# EAGLE board GPS_radiologger_v11 (EAGLE 9.5.1)
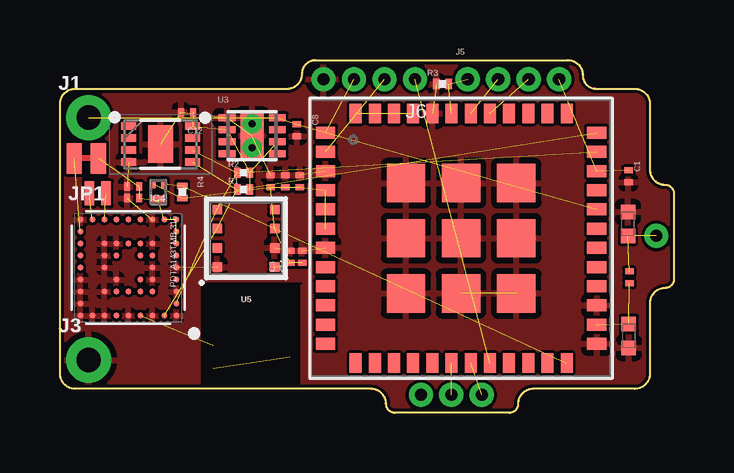
[diagram p0: board, top side]
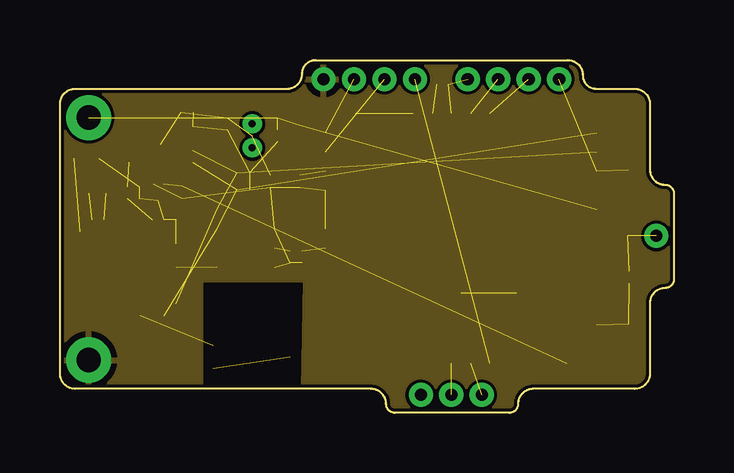
[diagram p1: board, inner layer Route2]
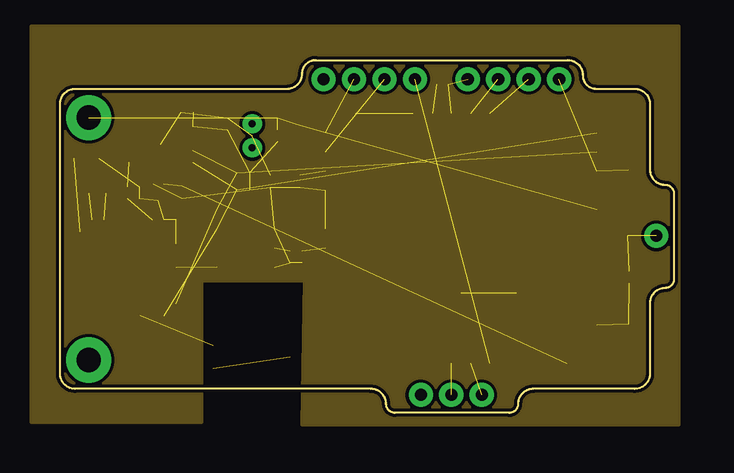
[diagram p2: board, inner layer Route15]
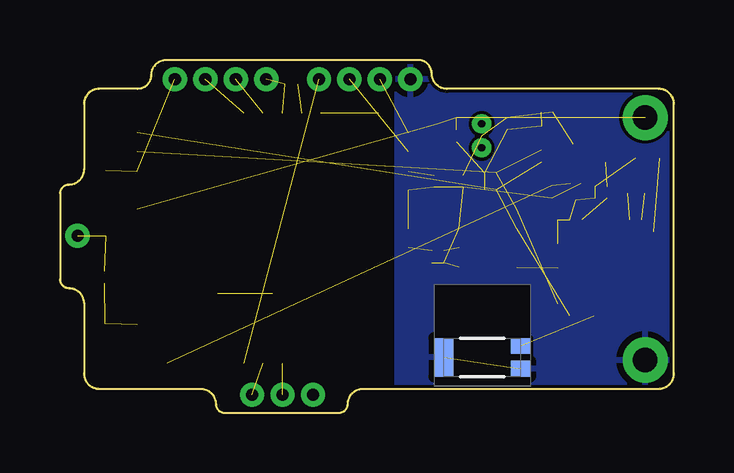
[diagram p3: board, bottom side, seen from below]

Size 25.6 x 14.7 mm. Coordinates in mm from the lower left corner, seen from the top.
Outline: 22.36,13.5 23.96,13.5 arc-90 24.6,12.87 24.6,10.13 arc90 25.23,9.5 arc-90 25.6,9.13 25.6,5.57 arc-90 25.23,5.2 arc90 24.6,4.56 24.6,1.64 arc-90 23.96,1 19.73,1 arc90 19.1,0.36 arc-90 18.73,0 13.96,0 arc-90 13.6,0.36 arc90 12.96,1 0.64,1 arc-90 0,1.64 0,12.87 arc-90 0.64,13.5 9.46,13.5 arc90 10.1,14.13 arc-90 10.66,14.7 21.16,14.7 arc-90 21.8,14.06 arc90 22.36,13.5
Copper layers (1+2*15+16): Top 0.035mm / dielectric 0.2mm / Route2 0.035mm / dielectric 0.23mm / Route15 0.035mm / dielectric 0.2mm / Bottom 0.035mm
Design rules "default *": minimum track width 5mil, minimum drill 0.25mm, track to track 5mil, track to pad 5mil, pad to pad 5mil, via to via 5mil, smd to smd 5mil, copper to edge 5mil, drill to drill 3mil, minimum pad ring 10mil, minimum via ring 5mil, stop-mask expansion 4mil, vias tented up to drill 0mil, thermal gap 10mil
Net classes: 1 vcc: width 0 mm

## Footprints (pad centres in the part's own frame; a part is rotated, then mirrored left to right if it is on the bottom)
C0201 = smd 0.25 x 0.35: 1 -0.25,0; 2 0.25,0
SON50P300X200X55-9N = smd 0.63 x 0.32: 1 -1.33,0.75; 2 -1.33,0.25; 3 -1.33,-0.25; 4 -1.33,-0.75; 5 1.33,-0.75; 6 1.33,-0.25; 7 1.33,0.25; 8 1.33,0.75 | smd 1.06 x 1.56: 9 0,0
1X01_NO_SILK = drill 1.016 pad 1.88: 1 0,0
1X01_SMALL = drill 0.508: P$1 0,0
1X03_1.27MM_NO_SILK = drill 0.508 pad 1: 1 0,0; 2 1.27,0; 3 2.54,0
1X04_1.27MM_NO_SILK = drill 0.508 pad 1: 1 0,0; 2 1.27,0; 3 2.54,0; 4 3.81,0
SMT-JUMPER_2_NC_TRACE_NO-SILK = smd 0.635 x 1.27: 1 -0.508,0; 2 0.508,0
0402-TIGHT = smd 0.6 x 0.6: 1 -0.5,0; 2 0.5,0
SOT883(B) = smd 0.4 x 0.25: 1 -0.35,0.225; 2 -0.35,-0.225 | smd 0.4 x 0.7: 3 0.35,0
R0201 = smd 0.28 x 0.43: 1 -0.255,0; 2 0.255,0
TYPEABZ = smd 0.8 x 0.5: P$1 -5.65,4.4; P$2 -5.65,3.6; P$3 -5.65,2.8; P$4 -5.65,2; P$5 -5.65,1.2; P$6 -5.65,0.4; P$7 -5.65,-0.4; P$8 -5.65,-1.2; P$9 -5.65,-2; P$10 -5.65,-2.8; P$11 -5.65,-3.6; P$12 -5.65,-4.4; P$25 5.65,-4.4; P$26 5.65,-3.6; P$27 5.65,-2.8; P$28 5.65,-2; P$29 5.65,-1.2; P$30 5.65,-0.4; P$31 5.65,0.4; P$32 5.65,1.2; P$33 5.65,2; P$34 5.65,2.8; P$35 5.65,3.6; P$36 5.65,4.4 | smd 0.5 x 0.8: P$13 -4.4,-5.2; P$14 -3.6,-5.2; P$15 -2.8,-5.2; P$16 -2,-5.2; P$17 -1.2,-5.2; P$18 -0.4,-5.2; P$19 0.4,-5.2; P$20 1.2,-5.2; P$21 2,-5.2; P$22 2.8,-5.2; P$23 3.6,-5.2; P$24 4.4,-5.2; P$37 4.4,5.2; P$38 3.6,5.2; P$39 2.8,5.2; P$40 2,5.2; P$41 1.2,5.2; P$42 0.4,5.2; P$43 -0.4,5.2; P$44 -1.2,5.2; P$45 -2,5.2; P$46 -2.8,5.2; P$47 -3.6,5.2; P$48 -4.4,5.2 | smd 1.6 x 1.6: P$49 -2.3,2.3; P$50 0,2.3; P$51 2.3,2.3; P$52 -2.3,0; P$53 0,0; P$54 2.3,0; P$55 -2.3,-2.3; P$56 0,-2.3; P$57 2.3,-2.3
UBLOX_ZOE_M8-0-10 = smd 0.25 x 0.25: 1 -1.996,2.004; 2 -1.496,2.004; 3 -0.996,2.004; 4 -0.496,2.004; 5 0.004,2.004; 6 0.504,2.004; 7 1.004,2.004; 8 1.504,2.004; 9 2.004,2.004; 10 2.004,1.504; 11 2.004,1.004; 12 2.004,0.504; 13 2.004,0.004; 14 2.004,-0.496; 15 2.004,-0.996; 16 2.004,-1.496; 17 2.004,-1.996; 18 1.504,-1.996; 19 1.004,-1.996; 20 0.504,-1.996; 21 0.004,-1.996; 22 -0.496,-1.996; 23 -0.996,-1.996; 24 -1.496,-1.996; 25 -1.996,-1.996; 26 -1.996,-1.496; 27 -1.996,-0.996; 28 -1.996,-0.496; 29 -1.996,0.004; 30 -1.996,0.504; 31 -1.996,1.004; 32 -1.996,1.504; 33 -0.996,1.004; 34 -0.496,1.004; 35 0.004,1.004; 36 0.504,1.004; 37 1.004,1.004; 38 1.004,0.004; 39 1.004,-0.496; 40 1.004,-0.996; 41 0.504,-0.996; 42 0.004,-0.996; 43 -0.496,-0.996; 44 -0.996,-0.996; 45 -0.996,-0.496; 46 -0.996,0.004; 47 -0.996,0.504; 48 -0.496,0.504; 49 0.504,0.504; 50 0.504,-0.496; 51 -0.496,-0.496
MICROCHIP_MCP1810T-33I-J8A_0 = smd 0.7 x 0.3: 1 -1.05,0.75; 2 -1.05,0.25; 3 -1.05,-0.25; 4 -1.05,-0.75; 5 1.05,-0.75; 6 1.05,-0.25; 7 1.05,0.25; 8 1.05,0.75 | smd 0.95 x 1.95: 9 0,0 | drill 0.3 pad 0.6: PAD_1 0,0.5; PAD_2 0,-0.5
LGA3.0X3.0 = smd 0.4 x 0.4: 1 1.2,1.2; 2 1.2,0.4; 3 1.2,-0.4; 4 1.2,-1.2; 5 -1.2,-1.2; 6 -1.2,-0.4; 7 -1.2,0.4; 8 -1.2,1.2
CRYSTAL-SMD-1.0X1.2MM = smd 0.4 x 1: P$1 0.35,0; P$2 -0.35,0
W3011 = smd 0.8 x 0.65: 1 1.6,0.475; 2 1.6,-0.475 | smd 0.8 x 1.6: 3 -1.6,0

## Placement (x,y rotation side)
C1  0.1 uF  [C0201]  23.7,9.85 270 top
C2  10 uF  [C0201]  10,9.64 270 top
C3  0.1 uF  [C0201]  9.6,6.5 90 top
C4  0.1 uF  [C0201]  10.1,6.5 90 top
C5  4.7 uF  [C0201]  3.05,9.43 180 top
C6  0.1 uF  [C0201]  3.05,8.95 180 top
C8  4.7 uF  [C0201]  9.88,11.78 270 top
C9  1 uF  [C0201]  9.4,9.65 270 top
C10  0.1 uF  [C0201]  8.78,9.65 270 top
C11  0.1 uF  [C0201]  23.74,5.64 270 top
C12  10 uF  [C0201]  5.3,12.52 180 top
IC4  CAT24M01HU5I-GT3  [SON50P300X200X55-9N]  4.2,11.2 0 top
J1  [1X01_NO_SILK]  1.2,12.3 0 top
J2  [1X01_SMALL]  24.86,7.38 0 top
J3  [1X01_NO_SILK]  1.2,2.2 0 top
J4  [1X03_1.27MM_NO_SILK]  15.05,0.75 0 top
J5  [1X04_1.27MM_NO_SILK]  17,13.9 0 top
J6  [1X04_1.27MM_NO_SILK]  14.8,13.9 180 top
JP1  JUMPER-SMT_2_NC_TRACE_NO-SILK  [SMT-JUMPER_2_NC_TRACE_NO-SILK]  1.1,10.6 180 top
L3  FERRITE_BEAD-120_OHM_TIGHT  [0402-TIGHT]  23.71,3.21 270 top
L4  FERRITE_BEAD-120_OHM_TIGHT  [0402-TIGHT]  23.68,7.87 90 top
PDTA143TMB,315  TINYPICO-PNPAMB  [SOT883(B)]  4.1,9.2 270 top
R1  4.7  [R0201]  7.65,9.3 0 top
R2  4.7  [R0201]  7.65,10 0 top
R3  10k  [R0201]  15.95,13.7 0 top
R4  100k  [R0201]  5.1,9.2 270 top
U1  TYPEABZ  [TYPEABZ]  16.73,7.27 0 top
U2  UBLOX_ZOE_M8-0-10  [UBLOX_ZOE_M8-0-10]  2.85,6.05 180 top
U3  MICROCHIP_MCP1810T-33I-J8AMICROCHIP_MCP1810T-33I-J8A_0_0  [MICROCHIP_MCP1810T-33I-J8A_0]  8.01,11.54 0 top
U5  BME680BME680  [LGA3.0X3.0]  7.76,7.27 180 top
Y1  32.768kHz  [CRYSTAL-SMD-1.0X1.2MM]  1.57,9.14 0 top
Y2  W3011  [W3011]  7.99,2.31 0 bottom

## Library data of the parts
C1-C6 C8-C12 = rcl; SPICEPREFIX: C
IC4 = CAT24M01HU5I-GT3-CorrectedV2; ALLIED_NUMBER: 70300250; ALLIED_PRICE-STOCK: http://www.alliedelec.com/on-semiconductor-cat24m01hu5i-gt3/70300250/; DESCRIPTION: EEPROM 1MB I2C SERIAL EEPROM; HEIGHT: 0.55mm; MANUFACTURER_NAME: ON Semiconductor; MANUFACTURER_PART_NUMBER: CAT24M01HU5I-GT3; MOUSER_PART_NUMBER: 863-CAT24M01HU5I-GT3; MOUSER_PRICE-STOCK: https://www.mouser.com/Search/Refine.aspx?Keyword=863-CAT24M01HU5I-GT3; RS_PART_NUMBER: 7814831P; RS_PRICE-STOCK: http://uk.rs-online.com/web/p/products/7814831P
J1-J6 = SparkFun-Connectors
JP1 = SparkFun-Jumpers
L3 L4 = SparkFun-Coils
PDTA143TMB,315 = UnexpectedMaker
R1-R4 = rcl; SPICEPREFIX: R
U1 = Kris
U2 = SparkFun-GPS; PROD_ID: IC-14251
U3 = MCP1810; CENTROID_NOT_SPECIFIED: No; DATASHEET: http://ww1.microchip.com/downloads/en/DeviceDoc/20005623A.pdf; DIGIKEY_DESCRIPTION: IC REG LINEAR 150MA 8-VDFN; DIGIKEY_PART_NUMBER: MCP1810T-33I/J8ACT-ND; IPC_LAND_PATTERN_NAME: DFN200X200X85-8; LEAD_FREE: yes; MF: Microchip; MFG_PACKAGE_IDENT: C04-3207A; MOUSER_PART_NUMBER: 579-MCP1810T-33I/J8A; MPN: MCP1810T-33I/J8A; PACKAGE: VDFN8; PREFIX: U; ROHS: yes; TEMPERATURE_RANGE_HIGH: +85°C; TEMPERATURE_RANGE_LOW: -40°C
U5 = SparkFun-Sensors; PROD_ID: IC-14656
Y1 = SparkFun-Clocks; XTAL: SC12S-7PF20PPM
Y2 = SparkFun-GPS; PROD_ID: ANT-14304

## Nets
ANT: C11.1 J2.P$1 L4.1
BAT: C8.1 J1.1 U1.P$32 U3.7 U3.8
BOOT: J5.1 R3.2 U1.P$43
DM: J6.2 U1.P$2
DP: J6.3 U1.P$1
GND: C1.2 C2.1 C3.2 C4.2 C5.2 C6.2 C8.2 C9.1 C10.1 C12.2 IC4.4 IC4.9 J3.1 J6.4 L3.2 L4.2 R3.1 U1.P$3 U1.P$7 U1.P$25 U1.P$27 U1.P$44 U1.P$49 U1.P$50 U1.P$51 U1.P$52 U1.P$53 U1.P$54 U1.P$55 U1.P$56 U1.P$57 U2.1 U2.3 U2.5 U2.7 U2.8 U2.9 U2.10 U2.11 U2.12 U2.17 U2.23 U2.29 U2.31 U2.37 U2.38 U2.39 U2.40 U2.41 U2.44 U2.46 U2.47 U2.49 U3.1 U3.9 U5.1 U5.7 Y2.2 Y2.3
GPS_ANT: U2.4 Y2.1
N$1: U1.P$45 U1.P$48
N$2: JP1.2 U2.16
N$14: U2.18 Y1.P$2
N$15: U2.19 Y1.P$1
N$32: C11.2 L3.1 U1.P$26
POWER: C2.2 C3.1 C4.1 C9.2 C10.2 C12.1 IC4.8 PDTA143TMB,315.2 R1.2 R2.2 R4.2 U1.P$4 U1.P$5 U1.P$6 U3.2 U3.6 U5.6 U5.8
RST: C1.1 J5.4 U1.P$34
RX: J4.2 U1.P$18
SCL: IC4.6 R2.1 U1.P$35 U2.32 U5.4
SDA: IC4.5 R1.1 U1.P$36 U2.2 U5.3
SWDCLK: J5.2 U1.P$42
SWDIO: J5.3 U1.P$41
TCXO_OUT: U1.P$46 U1.P$47
TX: J4.3 U1.P$19
V_DCDC_OUT: U2.26
VBUS: J6.1 U1.P$20
ZOE_PDTA: PDTA143TMB,315.1 R4.1 U1.P$24
ZOE_PWR: C5.1 C6.1 JP1.1 PDTA143TMB,315.3 U2.24 U2.25 U2.27

## Tracks (layer width: path | path; a pad name or v marks a point on that pad's centre or on a via)
ANT  (2 unrouted)
BAT  (4 unrouted)
BOOT  (2 unrouted)
DM  (1 unrouted)
DP  (1 unrouted)
GND  (13 unrouted)
  pour Route2: -0.7,15.4 25.8,15.4 25.8,-0.2 10.1,-0.2 10.2,5.5 5.9,5.5 5.9,0 -0.7,0.01
  pour Top: -0.5,15.8 26,15.8 26,-0.4 10.1,-0.4 10.1,5.3 10.2,5.3 10.2,5.5 5.8,5.5 5.8,-0.4 -0.5,-0.4
  pour Bottom: -1,16 11.6,16 11.6,0 10,0 10,5.4 6,5.4 6,0 -1,0
GPS_ANT  (1 unrouted)
N$1  (1 unrouted)
N$2  (1 unrouted)
N$14  (1 unrouted)
N$15  (1 unrouted)
N$32  (2 unrouted)
POWER  (17 unrouted)
  pour Route15: -1.2,16.1 25.8,16.1 25.8,-0.5 10.1,-0.5 10.2,5.5 5.9,5.5 5.9,-0.4 -1.2,-0.4
RST  (2 unrouted)
RX  (1 unrouted)
SCL  (4 unrouted)
SDA  (4 unrouted)
SWDCLK  (1 unrouted)
SWDIO  (1 unrouted)
TCXO_OUT  (1 unrouted)
TX  (1 unrouted)
VBUS  (1 unrouted)
ZOE_PDTA  (2 unrouted)
ZOE_PWR  (6 unrouted)